# Altium PCB Bluetooth_bulb.PcbDoc
Units mm, origin at the board's own origin, x right, y up, seen from the top; angles counter-clockwise.
Board outline 61.3 x 53.68 mm, 2 copper layers (Top Layer, Bottom Layer); 19 components, 15 nets, 73 pads, 4 vias.
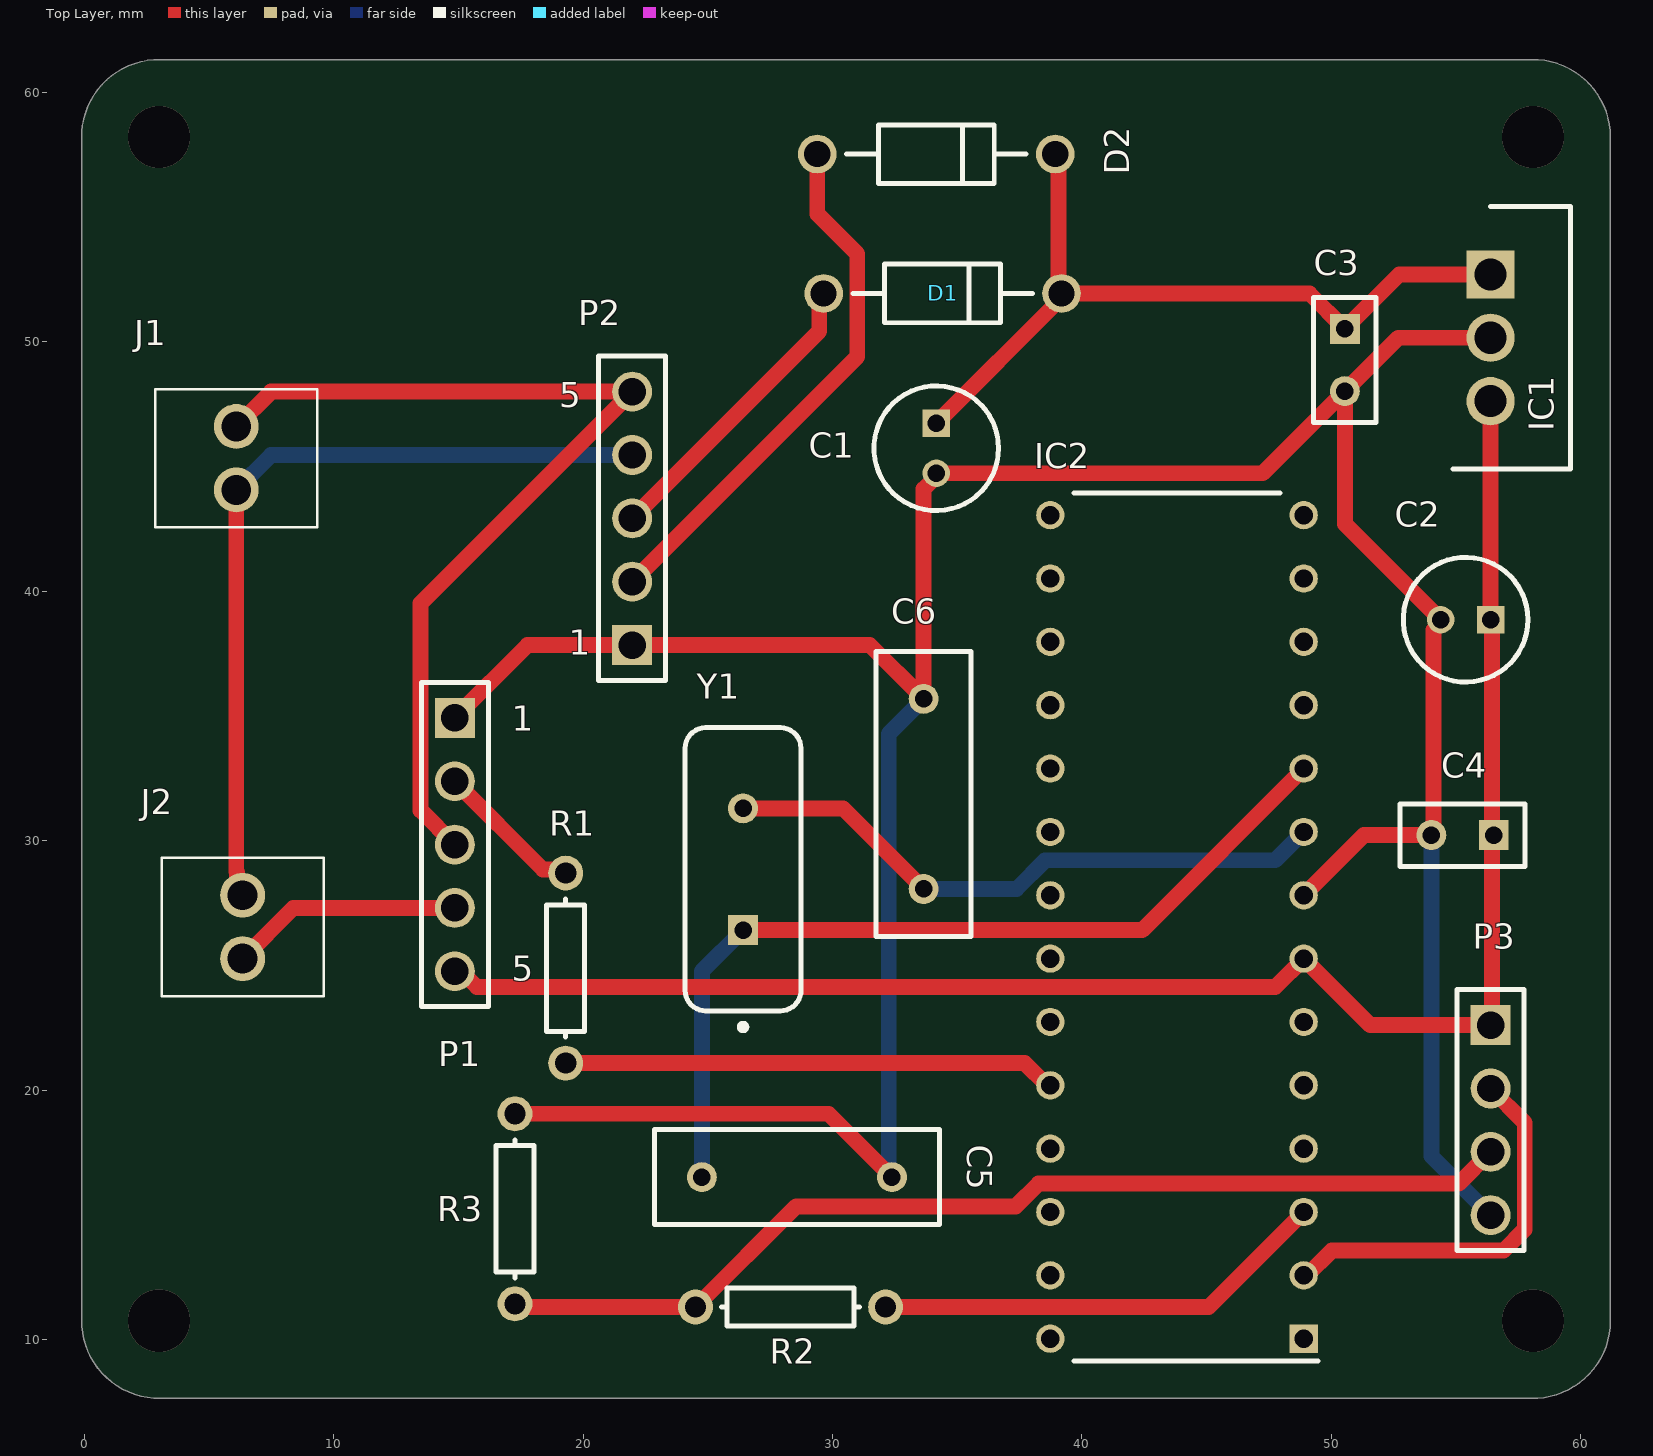
[diagram p0: Top Layer view]
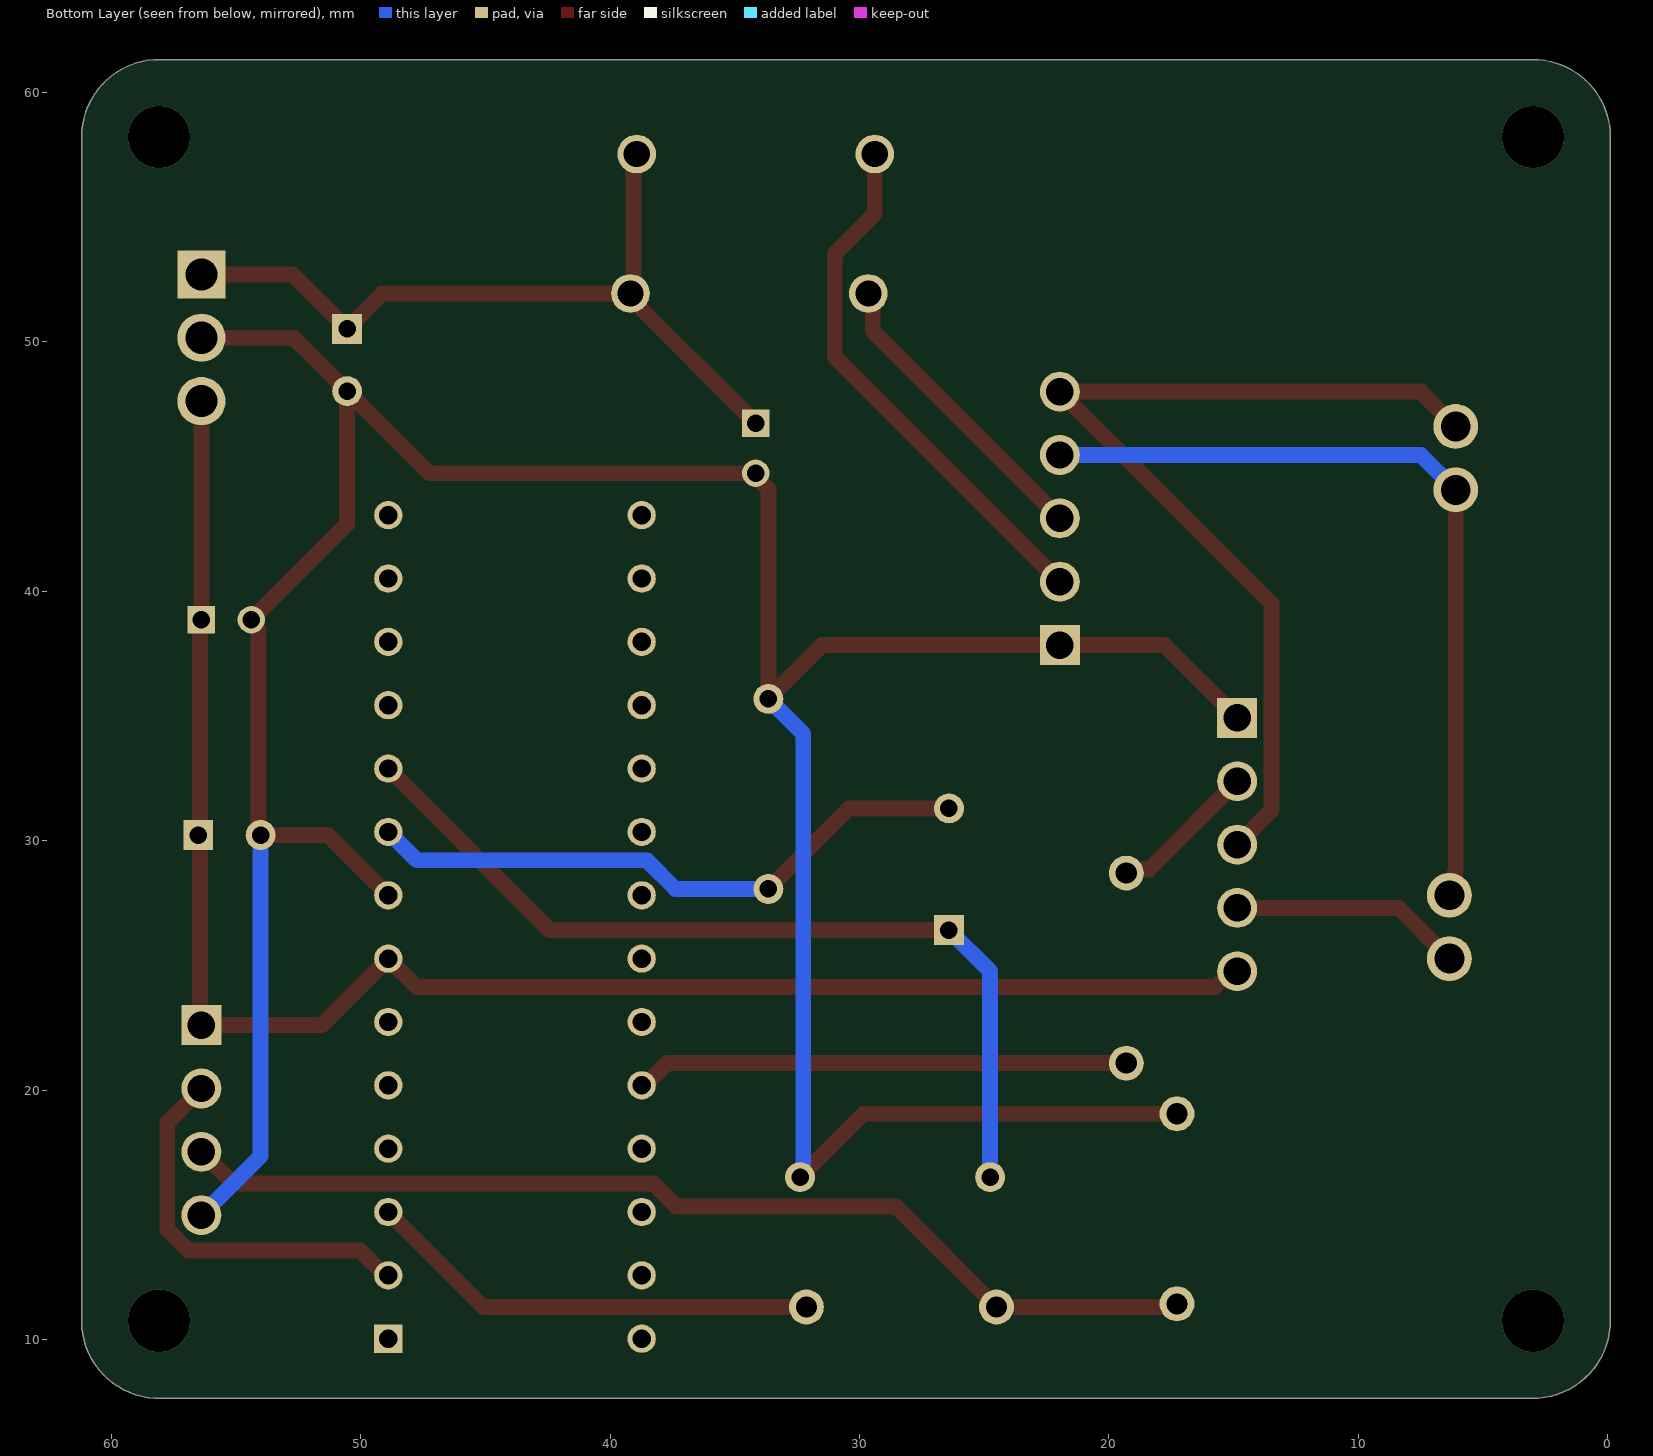
[diagram p1: Bottom Layer view, seen from below]
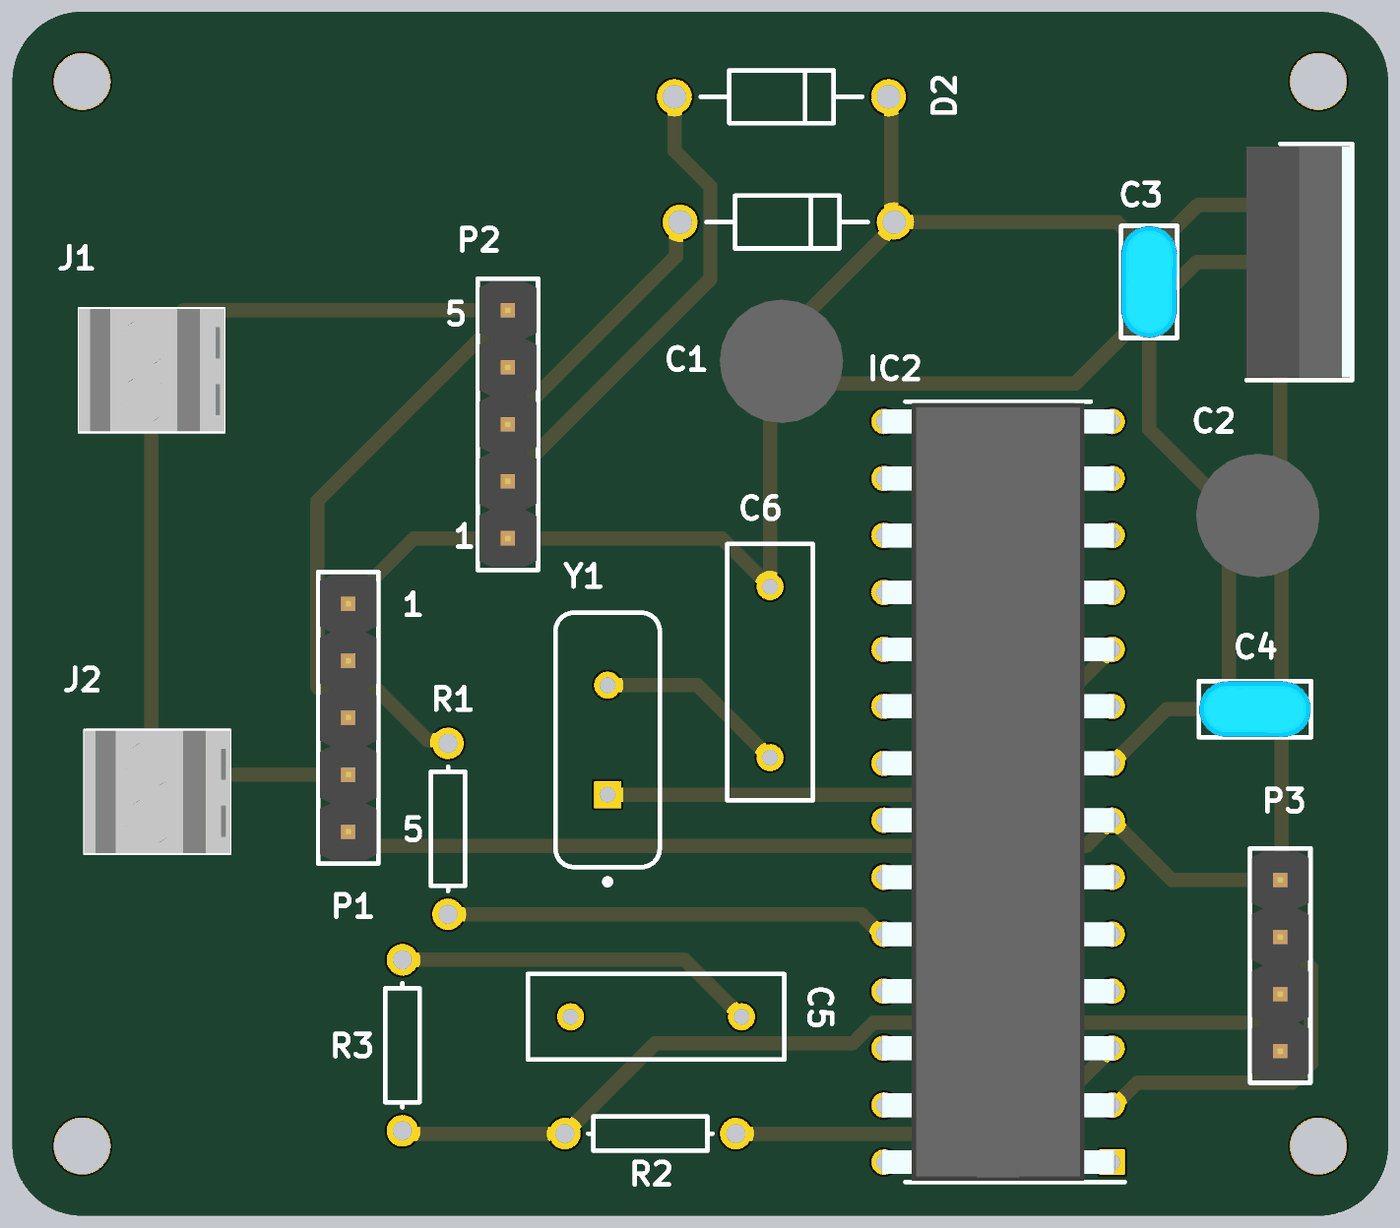
[diagram p2: 3D render of the assembled board from above, using the file's embedded part models]

## Layer stack, top to bottom
Top Solder: solder mask 0.0102, Solder Resist, Dk 3.5
Top Layer: signal copper 0.0356
Dielectric 1: dielectric 0.32, FR-4, Dk 4.8
Bottom Layer: signal copper 0.0356
Bottom Solder: solder mask 0.0102, Solder Resist, Dk 3.5

## Board outline
3.049,7.647 cw(c3,10.747) -0.1,10.796 -0.1,58.136 cw(c-0.005,58.166) -0.105,58.164 cw(c3,58.214) 3.05,61.319 cw(c3.048,61.219) 3.078,61.314 58.009,61.314 cw(c58.039,61.219) 58.037,61.319 cw(c58.087,58.214) 61.192,58.214 cw(c58.087,58.214) 61.192,58.164 cw(c61.092,58.166) 61.187,58.135 61.187,10.826 cw(c61.092,10.795) 61.192,10.797 cw(c58.087,10.747) 61.192,10.747 cw(c58.087,10.747) 58.268,7.647 cw(c58.087,10.747) 58.037,7.642 cw(c58.039,7.742) 58.009,7.647 3.049,7.647 ccw(c3,10.747)

## Design rules (kind name [scope] priority, off if disabled: settings)
Clearance [All] p1: gap=0.254 ignorepadtopadclearanceinfootprint=FALSE except(0: Arc-Hole Track-Hole SMDPad-Hole THPad-Hole Via-Hole Fill-Hole Poly-Hole Region-Hole Text-Hole)
PolygonConnect [All] p1: connectstyle=Relief reliefconductorwidth=0.254 reliefentries=4 polygonreliefangle="90 Angle" airgapwidth=0.254
RoutingVias [All] p1: holewidth=0.711 width=1.27 viastyle="Through Hole" minholewidth=0.711 minwidth=1.27 maxholewidth=0.711 maxwidth=1.27
SolderMaskExpansion [All] p1: expansion=0.102 istentingtop=FALSE
Width [All] p1: maxlimit=0.635 minlimit=0.508 preferedwidth=0.635 minimp=50.000000 maximp=50.000000 favimp=50.000000
30 further rules are at their usual default settings.

## Components (designator, comment, footprint, x,y, rotation, side; value= is the part's Value field where it differs from the comment)
C1 "0.22uF" CAPPRD200W52D500H1250 34.163,46.736 r270 top
C2 "10uF" CAPPRD200W52D500H1250 56.388,38.862 r180 top
C3 "0.uF" FP-RDE0P1-MFG 50.546,49.276 r270 top
C4 "0.1uF" FP-RDE0P1-MFG 55.265,30.226 r180 top
C5 "Cap" RAD-0.3 28.575,16.51 r0 top value=100pF
C6 "Cap" RAD-0.3 33.655,31.877 r90 top value=100pF
D1 "1N4004" ONSC-AXIAL_LEAD-2-59-10_P 34.417,51.943 r180 top
D2 "1N4004" ONSC-AXIAL_LEAD-2-59-10_P 34.163,57.531 r180 top
IC1 "7805 regulator" TO254P470X1028X1955-3P 56.388,52.705 r270 top
IC2 "ATMEGA328-PU" DIP1016W53P254L3468H457Q28N 43.815,26.543 r180 top
J1 "AC in" 15462152 6.096,46.609 r270 top
J2 "Bulb" 15462152 6.35,27.813 r270 top
P1 "relay" 61300511121 14.859,29.845 r270 top
P2 "transformer" 61300511121 21.971,42.926 r90 top
P3 "61300411121" 61300411121 56.388,18.796 r270 top
R1 "Res1" AXIAL-0.3 19.304,24.892 r90 top value=10K
R2 "Res1" AXIAL-0.3 28.321,11.303 r180 top value=1K
R3 "Res1" AXIAL-0.3 17.272,15.24 r270 top value=2K
Y1 "FOXSLF/160-20" FOX-FOXSLF160-20 26.416,28.856 r90 top

## Footprints (in the part's own frame and the unit in brackets; to place one, negate y for a bottom-side part, rotate by r counter-clockwise, add the part's x,y. Pads: shape width x height; smd on the part's side, far side on the other; paste and mask are expansions set on the pad)
15462152 [mm]
  round 1.8 hole 1.2: 1(0,0) 2(2.54,0)
  silkscreen extent -1.5,-3.25 4.04,3.25, body extent -1.46,-3.25 4,3.25, height 9.91
61300411121 [mm] "Pin Header, pitch 2.54 mm, THT, Vertical, single row, 4p"
  rect 1.6x1.6 hole 1.1: 1(-3.81,0)
  round 1.6 hole 1.1: 2(-1.27,0) 3(1.27,0) 4(3.81,0)
  silkscreen extent -5.23,-1.34 5.23,1.34, body extent -5.08,-1.27 5.08,1.27, height 8.57
61300511121 [mm] "Pin Header, pitch 2.54 mm, THT, Vertical, single row, 5p"
  rect 1.6x1.6 hole 1.1: 1(-5.08,0)
  round 1.6 hole 1.1: 2(-2.54,0) 3(0,0) 4(2.54,0) 5(5.08,0)
  silkscreen extent -6.5,-1.34 6.5,1.34, body extent -6.35,-1.27 6.35,1.27, height 8.57
AXIAL-0.3 [mm] "Axial Device, Thru-Hole; 2 Leads; 0.3 in Pin Spacing"
  round 1.4 hole 0.85: 1(-3.81,0) 2(3.81,0)
  silkscreen extent -2.77,-0.76 2.77,0.76
CAPPRD200W52D500H1250 [mm]
  rect 1.1x1.1 hole 0.7: 1(0,0)
  round 1.1 hole 0.7: 2(2,0)
  silkscreen extent -1.5,-2.5 3.5,2.5, body extent -1.75,-2.75 3.75,2.75, height 12.5
DIP1016W53P254L3468H457Q28N [mm]
  rect 1.133x1.133 hole 0.733: 1(-5.08,16.51)
  round 1.133 hole 0.733: 2(-5.08,13.97) 3(-5.08,11.43) 4(-5.08,8.89) 5(-5.08,6.35) 6(-5.08,3.81) 7(-5.08,1.27) 8(-5.08,-1.27) 9(-5.08,-3.81) 10(-5.08,-6.35) 11(-5.08,-8.89) 12(-5.08,-11.43) 13(-5.08,-13.97) 14(-5.08,-16.51) 15(5.08,-16.51) 16(5.08,-13.97) 17(5.08,-11.43) 18(5.08,-8.89) 19(5.08,-6.35) 20(5.08,-3.81) 21(5.08,-1.27) 22(5.08,1.27) 23(5.08,3.81) 24(5.08,6.35) 25(5.08,8.89) 26(5.08,11.43) 27(5.08,13.97) 28(5.08,16.51)
  silkscreen extent -5.65,-17.4 4.13,17.4, body extent -5.21,-17.34 5.21,17.34, height 4.57
FOX-FOXSLF160-20 [mm] "THD, 2-Leads, Body 11.35x4.65mm"
  rect 1.2x1.2 hole 0.7: 1(-2.44,0)
  round 1.2 hole 0.7: 2(2.44,0)
  silkscreen extent -6.45,-2.32 5.68,2.32, body extent -5.67,-2.32 5.68,2.33, height 3.6
FP-RDE0P1-MFG [mm]
  rect 1.2x1.2 hole 0.7 paste-1000 mask+0: 1(-1.25,0)
  round 1.2 hole 0.7 paste-1000 mask+0: 2(1.25,0)
  silkscreen extent -2.5,-1.25 2.5,1.25, body extent -2.6,-1.35 2.6,1.35, height 0.25
ONSC-AXIAL_LEAD-2-59-10_P [mm] "AXIAL, 2-Leads, Diameter 2.35mm"
  round 1.55 hole 1.05: 1(-4.77,0) 2(4.77,0)
  silkscreen extent -3.59,-1.17 3.59,1.17
RAD-0.3 [mm] "Radial Cap, Thru-Hole; 2 Leads; 0.3 in Pin Spacing"
  round 1.2 hole 0.7: 1(-3.81,0) 2(3.81,0)
  silkscreen extent -5.71,-1.91 5.71,1.91
TO254P470X1028X1955-3P [mm]
  rect 1.935x1.935 hole 1.29: 1(0,0)
  round 1.935 hole 1.29: 2(2.54,0) 3(5.08,0)
  silkscreen extent -2.73,-1.5 7.81,3.2, body extent -2.6,-1.5 7.68,3.2, height 18.66

## Part data
C1 C2: library part 860010672002, "Capacitor Polarised", Manufacturer_Name="Wurth Elektronik", Mouser Part Number=710-860010672002, Datasheet Link=https://katalog.we-online.de/pbs/datasheet/860010672002.pdf, Height=12.5mm, Manufacturer_Part_Number=860010672002, Mouser Price/Stock=https://www.mouser.co.uk/ProductDetail/Wurth-Elektronik/860010672002?qs=0KOYDY2FL28NZKbGYYvb0A%3D%3D
C3 C4: library part CMP-06035-036375-1, "Ceramic Capacitor 100nF ±10% 25V X7R Radial", Capacitance=100nF, Case/Package=Radial, Dielectric=X7R, Max Operating Temperature=125°C, Min Operating Temperature=-55°C, Package Quantity=500, Resistor Type=Ceramic, Tolerance=10%, Voltage Rating=25V, Height=3.5mm, Height - Seated (Max)=0.236inch, Lead Diameter=0.5mm, Lead Free="Lead Free", Lead Pitch=0.098inch, Length=0.197inch, Mount="Through Hole", Packaging=Bulk, Termination=Radial, Voltage Rating (DC)=25V, Width=0.098inch
C5 C6: "Capacitor", LatestRevisionDate=17-Jul-2002, LatestRevisionNote="Re-released for DXP Platform.", PackageDescription="Radial Cap, Thru-Hole; 2 Leads; 0.3 in Pin Spacing", PackageReference=RAD-0.3, Published=8-Jun-2000, Publisher="Altium Limited"
D1 D2: library part CMP-0902-00115-1, "Standard Recovery Rectifier, 2-Pin Axial_Lead, Pb-Free, Bulk Bag", Manufacturer="On Semiconductor", ComponentLink1Description="Manufacturer URL", ComponentLink1URL=http://www.onsemi.com/, ComponentLink2Description=Datasheet, ComponentLink2URL=http://www.onsemi.com/pub_link/Collateral/1N4001-D.PDF, ComponentLink3Description="Package Specification", ComponentLink3URL=http://www.onsemi.cn/pub_link/Collateral/59-10.PDF, DatasheetVersion="Rev. 13", IFSM Max (A)=30, IO(rec) Max (A)=1, Mounting Technology="Through Hole", PackageDescription="2-Pin, Axial Lead, Diameter 2.35 mm", PackageReference=AXIAL_LEAD-2-59-10, PackageVersion="Rev. U, 02/2005", Packing="Bulk Bag", PartNumber=1N4004, RoHS=TRUE, Type="Standard Recovery", VRRM Max (V)=400
IC1: library part LM7805CT_NOPB, "Integrated Circuit", Arrow Part Number=LM7805CT/NOPB, Manufacturer_Name="Texas Instruments", Mouser Part Number=926-LM7805CT/NOPB, Arrow Price/Stock=https://www.arrow.com/en/products/lm7805ctnopb/texas-instruments?region=nac, Datasheet Link=http://www.ti.com/lit/gpn/lm7800, Height=4.7mm, Manufacturer_Part_Number=LM7805CT/NOPB, Mouser Price/Stock=https://www.mouser.co.uk/ProductDetail/Texas-Instruments/LM7805CT-NOPB?qs=OYMYEaN9QmBS2GvaX6GSkQ%3D%3D
IC2: "Integrated Circuit", Manufacturer_Name=Microchip, Mouser Part Number=556-ATMEGA328-PU, Arrow Part Number=ATMEGA328-PU, Arrow Price/Stock=https://www.arrow.com/en/products/atmega328-pu/microchip-technology?region=nac, Datasheet Link=https://componentsearchengine.com/Datasheets/1/ATMEGA328-PU.pdf, Height=4.572mm, Manufacturer_Part_Number=ATMEGA328-PU, Mouser Price/Stock=https://www.mouser.co.uk/ProductDetail/Microchip-Technology-Atmel/ATMEGA328-PU?qs=lwdSMh1%2FoYJT8tfItQpQtA%3D%3D
J1 J2: library part 1546215-2, "Connector", Manufacturer_Name="TE Connectivity", Mouser Part Number=571-1546215-2, Arrow Part Number=1546215-2, Arrow Price/Stock=https://www.arrow.com/en/products/1546215-2/te-connectivity, Datasheet Link=https://www.te.com/commerce/DocumentDelivery/DDEController?Action=srchrtrv&DocNm=1546215&DocType=Customer+Drawing&DocLang=English, Height=10.3mm, Manufacturer_Part_Number=1546215-2, Mouser Price/Stock=https://www.mouser.co.uk/ProductDetail/TE-Connectivity/1546215-2?qs=Lxq28tKK6BPmJFoAOY7Ljw%3D%3D
P1 P2: library part CMP-1502-01068-1, "THT Vertical Pin Header WR-PHD, Pitch 2.54 mm, Single Row, 5 pins", Contact Resistance=20mOhm, Manufacturer="Wurth Elektronik", Operating Temperature=-40to105degC, Package Reference=61300511121, Rated Current=3A, Withstanding Voltage=500VAC, Working Voltage=250VAC, Datasheet URL=https://katalog.we-online.de/em/datasheet/6130xx11121.pdf, Gender=Male, Manufacturer URL=http://www.we-online.de, Mounting Technology=THT, Orientation=Vertical, Packaging=Bag, Part Number=61300511121, Pin Number=5, Pitch=2.54mm, Publisher=WurthElektronik, Row Number=Single
P3: library part CMP-1502-01064-1, "THT Vertical Pin Header WR-PHD, Pitch 2.54 mm, Single Row, 4 pins", Contact Resistance=20mOhm, Manufacturer="Wurth Elektronik", Operating Temperature=-40to105degC, Rated Current=3A, Withstanding Voltage=500VAC, Working Voltage=250VAC, Datasheet URL=https://katalog.we-online.de/em/datasheet/6130xx11121.pdf, Gender=Male, Manufacturer URL=http://www.we-online.de, Mounting Technology=THT, Orientation=Vertical, Package Reference=61300411121, Packaging=Bag, Part Number=61300411121, Pin Number=4, Pitch=2.54mm, Publisher=WurthElektronik, Row Number=Single
R1 R2 R3: "Resistor", LatestRevisionDate=17-Jul-2002, LatestRevisionNote="Re-released for DXP Platform.", PackageDescription="Axial Device, Thru-Hole; 2 Leads; 0.3 in Pin Spacing", PackageReference=AXIAL-0.3, Published=8-Jun-2000, Publisher="Altium Limited"
Y1: library part CMP-1749-00003-1, "Resistance Weld Thru-Hole Crystal, 16 MHz, -20 to 70 degC, 2-Pin THD, RoHS, Bulk", Case\Package=Axial, Max Operating Temperature="155 degC", Min Operating Temperature="-55 degC", Package Quantity=200, Power Rating="250 mW", Resistance="221 kohm", Tolerance=1%, Voltage Rating="250 V", ComponentLink1Description="Manufacturer URL", ComponentLink1URL=http://www.foxonline.com/, ComponentLink2Description=Datasheet, ComponentLink2URL=http://www.foxonline.com/pdfs/hc49slf.pdf, DatasheetVersion=Mar-15, Length="0.248 inch", Mount="Through Hole", PackageDescription="2-Pin Through Hole Device, Body 11.35 x 4.65 mm", PackageReference=FOXSLF160-20, Packaging=Bulk, RoHSCompliant=true

## Via types
v1: diameter 2.5, hole 2.5, Top Layer to Bottom Layer, 4 vias

## Nets (pads, with @x,y where several pads share a name; then routed paths per layer and width w, separated by ;. In a path a pad name is that pad's centre, name@x,y a point inside that pad or via, vN(x,y) a via of type N, cw(c..) or ccw(c..) an arc to the next point about the centre after c; other vN are vias at no path point)
+5: C2.1 C4.1 IC1.3 IC2.7 P1.5 P3.1 | length 68.5
  Top Layer w0.635: P1.5 15.12,24.765 15.75,24.135 47.757,24.135 IC2.7 51.562,22.606 P3.1 56.451,22.669 56.451,30.162 C4.1 56.451,30.29 56.451,38.798 C2.1 IC1.3
+AC: J1.2 J2.1 P2.4 | length 32.8
  Top Layer w0.635: J1.2 6.096,28.767 6.127,28.736 6.127,28.036 J2.1
  Bottom Layer w0.635: J1.2 7.493,45.466 P2.4
-AC: J1.1 P1.3 P2.5 | length 38.7
  Top Layer w0.635: J1.1 7.493,48.006 P2.5 13.487,39.522 13.487,31.217 P1.3
GND: C1.2 C2.2 C3.2 C4.2 C5.2 C6.2 IC1.2 IC2.8 P1.1 P2.1 P3.4 R3.1 | length 132.5
  Top Layer w0.635: P1.1 17.78,37.846 P2.1 31.496,37.846 C6.2 33.655,44.102 34.163,44.61 C1.2 47.256,44.736 C3.2 ; R3.1 29.845,19.05 C5.2 ; IC2.8 51.308,30.226 C4.2 54.102,30.313 54.102,38.45 54.388,38.736 C2.2 50.546,42.704 C3.2 ; IC1.2 52.685,50.165 C3.2
  Bottom Layer w0.635: C5.2 32.277,16.618 32.277,17.018 32.258,17.037 32.258,34.29 C6.2 ; C4.2 54.015,17.359 P3.4
NetC5_1: C5.1 IC2.10 Y1.1 | length 35.8
  Top Layer w0.635: Y1.1 42.418,26.416 IC2.10
  Bottom Layer w0.635: C5.1 24.765,24.765 Y1.1
NetC6_1: C6.1 IC2.9 Y1.2 | length 24.8
  Top Layer w0.635: Y1.2 30.426,31.296 C6.1
  Bottom Layer w0.635: C6.1 37.38,28.067 38.528,29.215 47.757,29.215 IC2.9
NetD1_2: D1.2 P2.3 | length 12.2
  Top Layer w0.635: P2.3 29.472,50.427 29.472,51.768 D1.2
NetD2_2: D2.2 P2.2 | length 21.5
  Top Layer w0.635: P2.2 30.993,49.408 30.993,53.534 29.393,55.135 D2.2
NetIC2_2: IC2.2 P3.2 | length 15.8
  Top Layer w0.635: IC2.2 49.03,12.573 50.023,13.566 56.908,13.566 57.76,14.418 57.76,18.694 P3.2
NetIC2_3: IC2.3 R2.1 | length 18.3
  Top Layer w0.635: R2.1 45.085,11.303 IC2.3
NetIC2_24: IC2.24 R1.1 | length 19.8
  Top Layer w0.635: R1.1 37.711,21.082 38.6,20.193 IC2.24
NetJ2_2: J2.2 P1.4 | length 9.4
  Top Layer w0.635: J2.2 8.382,27.305 P1.4
NetP1_2: P1.2 R1.2 | length 6
  Top Layer w0.635: P1.2 18.396,28.848 19.158,28.848 R1.2
NetP3_3: P3.3 R2.2 R3.2 | length 41.7
  Top Layer w0.635: R3.2 17.399,11.303 R2.2 28.546,15.338 37.351,15.338 38.264,16.251 55.113,16.251 P3.3
VCC: C1.1 C3.1 D1.1 D2.1 IC1.1 | length 31.7
  Top Layer w0.635: C1.1 39.187,51.76 D1.1 ; D2.1 39.06,57.404 39.06,52.07 D1.1 ; IC1.1 52.725,52.705 C3.1 49.129,51.943 D1.1
pads on no net: IC2.1 IC2.4 IC2.5 IC2.6 IC2.11 IC2.12 IC2.13 IC2.14 IC2.15 IC2.16 IC2.17 IC2.18 IC2.19 IC2.20 IC2.21 IC2.22 IC2.23 IC2.25 IC2.26 IC2.27 IC2.28
copper on no net:
  other v1: 3,10.747 58.087,10.747 3,58.214 58.087,58.214

## Silkscreen, mask and mechanical layers (free items; w line width, h text height)
Outline:
  lines w0.2: -0.005,58.166 cw(c3,58.214) 3.048,61.219 ; 0,10.795 0,58.166 ; 0.015,11.048 ccw(c3,10.747) 3.048,7.747 58.262,7.747 ; 3.048,61.214 58.044,61.214 ; 58.039,7.742 ccw(c58.087,10.747) 61.092,10.795 ; 58.039,61.219 cw(c58.087,58.214) 61.092,58.166 ; 61.087,10.572 61.087,58.166

## Text inside footprints (layer, text, board x,y; h text height)
P1: Top Overlay "5" at 17.145,24.384 h1; Top Overlay "1" at 17.145,34.417 h1
P2: Top Overlay "5" at 19.05,47.371 h1; Top Overlay "1" at 19.431,37.465 h1